# Altium PCB PCB.PcbDoc
Units mil, origin at the board's own origin, x right, y up, seen from the top; angles counter-clockwise.
Board outline 6000 x 4000 mil, 2 copper layers (Top Layer, Bottom Layer); 41 components, 27 nets, 106 pads, 32 vias.
Unrouted connection lines stored in the file: 69.
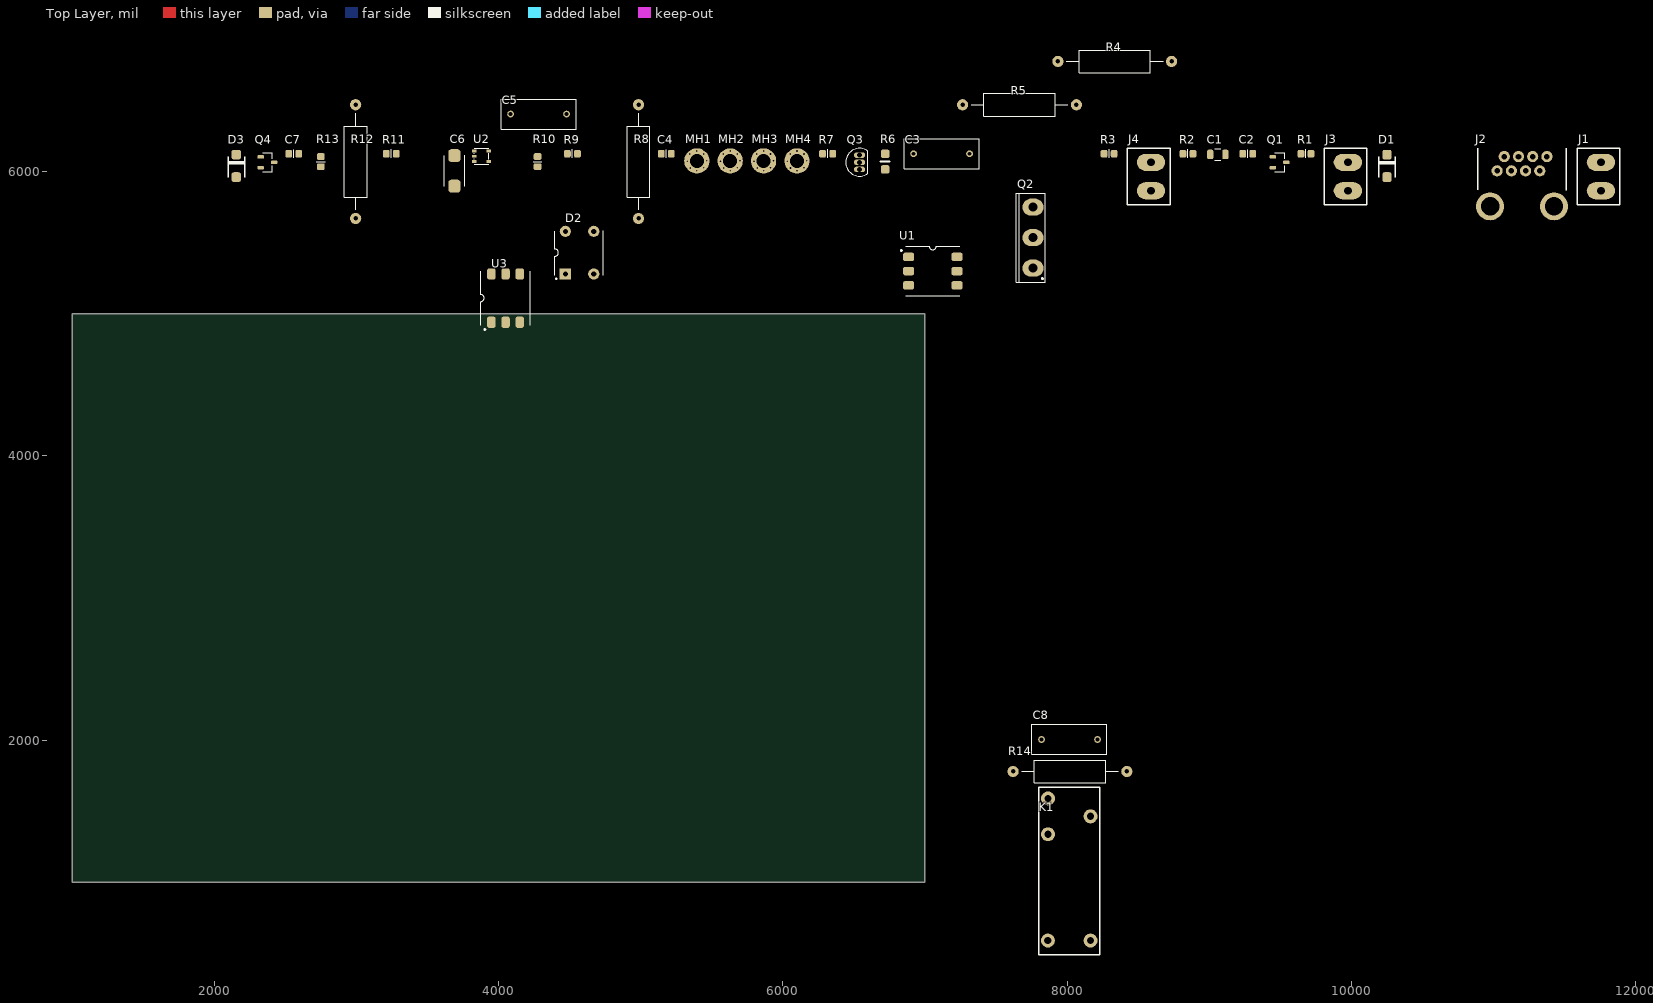
[diagram p0: Top Layer view]
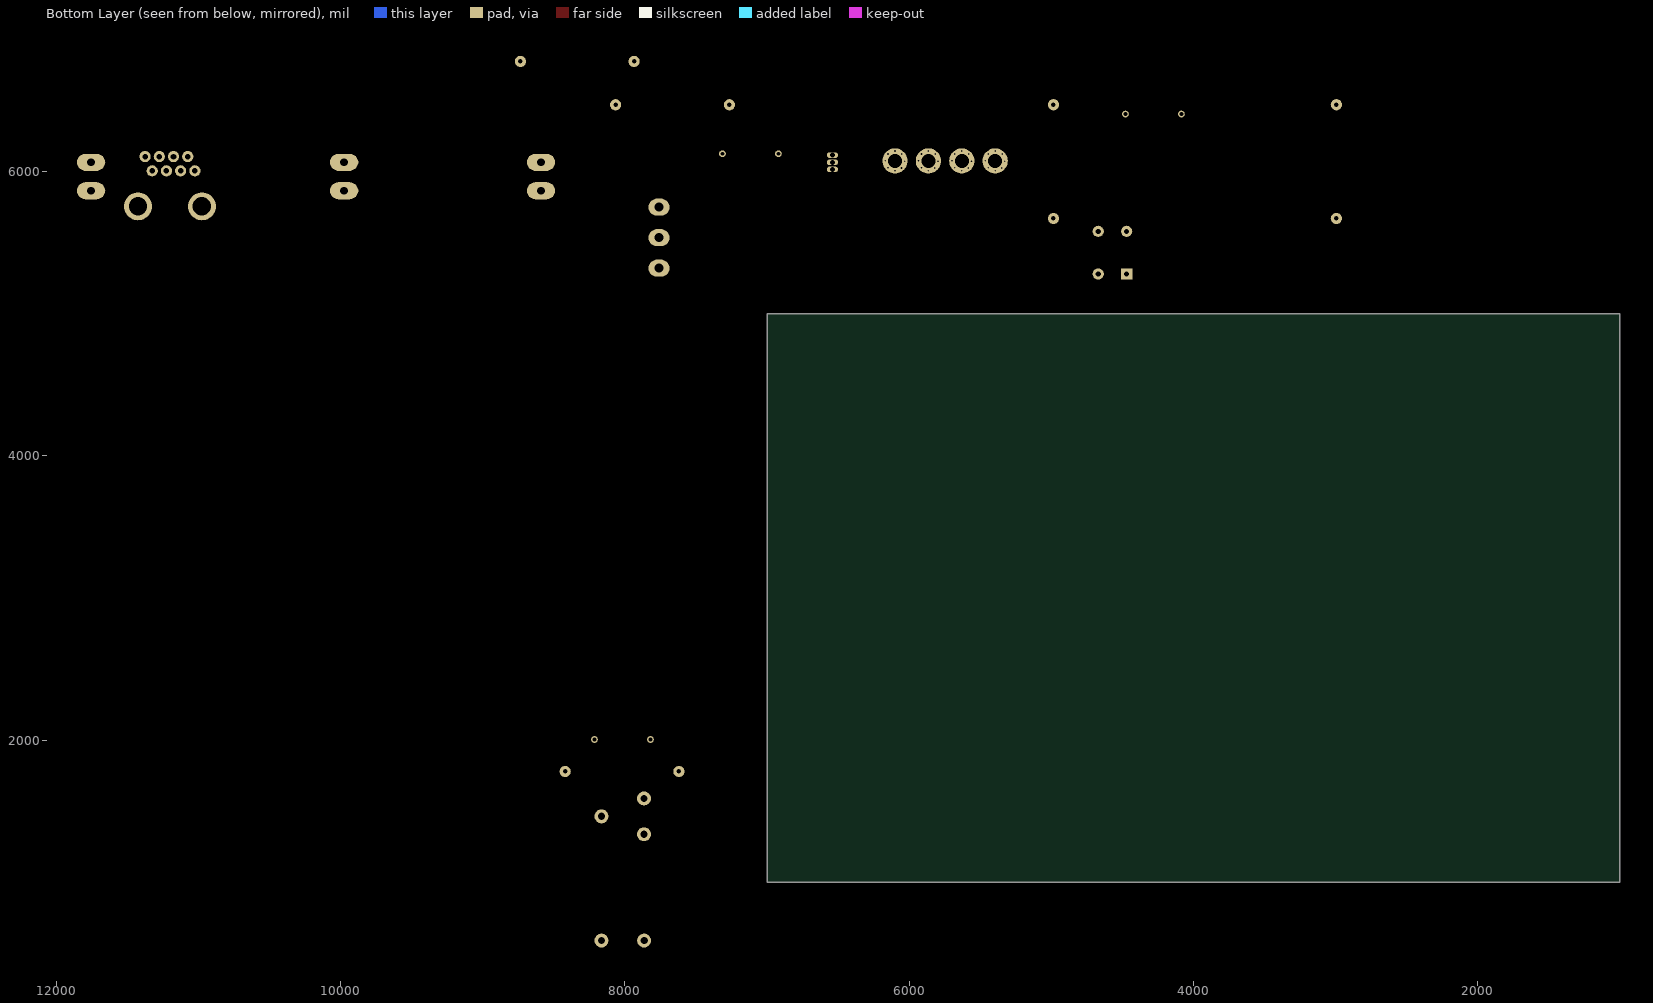
[diagram p1: Bottom Layer view, seen from below]

## Layer stack, top to bottom
Top Solder: solder mask 0.4, Solder Resist, Dk 3.5
Top Layer: signal copper 1.4
Dielectric 1: dielectric 12.6, FR-4, Dk 4.8
Bottom Layer: signal copper 1.4
Bottom Solder: solder mask 0.4, Solder Resist, Dk 3.5

## Board outline
1000,1000 7000,1000 7000,5000 1000,5000

## Design rules (kind name [scope] priority, off if disabled: settings)
Clearance [All] p1: gap=10 ignorepadtopadclearanceinfootprint=FALSE except(0: Arc-Hole Track-Hole SMDPad-Hole THPad-Hole Via-Hole Fill-Hole Poly-Hole Region-Hole Text-Hole)
PolygonConnect [All] p1: connectstyle=Relief reliefconductorwidth=10 reliefentries=4 polygonreliefangle="90 Angle" airgapwidth=10
RoomDefinition boxer_hv230 [InComponentClass('boxer_hv230')] p1: confinementstyle=ConfineIn formatcopy=TRUE lockcomponents=FALSE outline 154.57,0 12410,0 12410,7840 154.57,7840
RoutingVias [All] p1: holewidth=28 width=50 viastyle="Through Hole" minholewidth=28 minwidth=50 maxholewidth=28 maxwidth=50
SolderMaskExpansion [All] p1: expansion=4
Width [All] p1: maxlimit=10 minlimit=10 preferedwidth=10
30 further rules are at their usual default settings.

## Components (designator, comment, footprint, x,y, rotation, side; value= is the part's Value field where it differs from the comment)
C1 "Capacitor" C_1206 9060,6120.43 r0 top value=10u
C2 "Capacitor" C_0805 9270,6125.43 r0 top value=100n
C3 "Capacitor" RAD-0.4 6920,6125.43 r0 top value=10n/400V
C4 "Capacitor" C_0805 5180,6125.43 r0 top value=100n
C5 "Capacitor" RAD-0.4 4085,6405 r0 top value=1n/400V
C6 "Capacitor Polar" C_SMC 3690,6005.43 r90 top value=4u7
C7 "Capacitor" C_0805 2560,6125.43 r0 top value=100n
C8 "Capacitor" RAD-0.4 8213.7,2005 r180 top value=10n/400V
D1 "SS110-TP" D_SMA 10250,6040.43 r90 top
D2 "DB104" DB10x 4570,5430 r90 top
D3 "1N4007" D_SMA 2155,6040.43 r90 top
J1 "TB-5.08-P-2P/BL" "NINIGI TB-5.08 2pin" 11755,5965.43 r90 top
J2 "54601-908WPLF" RJ45_54601-908WPLF 11025,6005.43 r0 top
J3 "TB-5.08-P-2P/BL" "NINIGI TB-5.08 2pin" 9975,5965.43 r90 top
J4 "TB-5.08-P-2P/BL" "NINIGI TB-5.08 2pin" 8590,5965.43 r90 top
K1 "Relay" RM96_1P 8014.57,1086.5 r90 top value=RM96-3011-35-1005
MH1 "Mounting hole" MH_M2.5 5395,6075.43 r0 top
MH2 "Mounting hole" MH_M2.5 5630,6075.43 r0 top
MH3 "Mounting hole" MH_M2.5 5865,6075.43 r0 top
MH4 "Mounting hole" MH_M2.5 6100,6075.43 r0 top
Q1 "BC817-40-DIO" SOT-23 9495,6065.43 r0 top
Q2 "BTA41-600BRG" TO-247 7760,5535 r90 top
Q3 "BC817-40-DIO" TO-92 6540,6065.43 r0 top
Q4 "BC817-40-DIO" SOT-23 2375,6065.43 r0 top
R1 "Resistor" R_0805 9680,6125.43 r0 top value=4k7
R2 "Resistor" R_0805 8850,6125.43 r0 top value=47k
R3 "Resistor" R_0805 8295,6125.43 r0 top value=365
R4 "Resistor" AXIAL-0.8 8335,6775 r0 top value=47/1W
R5 "electropark.pl: 6618" AXIAL-0.8 7665,6470 r0 top value=330/1W
R6 "Resistor" R_1206 6720,6070.43 r90 top value=10k
R7 "Resistor" R_0805 6315,6125.43 r0 top value=100k
R8 "Resistor" AXIAL-0.8 4985,6070.43 r90 top value=220k
R9 "Resistor" R_0805 4520,6125.43 r0 top value=4k7
R10 "Resistor" R_0805 4275,6070.43 r90 top value=1k
R11 "Resistor" R_0805 3245,6125.43 r0 top value=33
R12 "Resistor" AXIAL-0.8 2995,6070.43 r90 top value=220k
R13 "Resistor" R_0805 2750,6070.43 r90 top value=22k
R14 "Resistor" AXIAL-0.8 8020,1780 r0 top value=47/1W
U1 "Triac Opto" SOP6 7055,5300 r0 top value=MOC3052S
U2 "NC7NZ14K8X" SOP5(6) 3830,6145.43 r0 top
U3 "4N35XSM" SOP6 4049.57,5110.43 r90 top

## Footprints (in the part's own frame and the unit in brackets; to place one, negate y for a bottom-side part, rotate by r counter-clockwise, add the part's x,y. Pads: shape width x height; smd on the part's side, far side on the other; paste and mask are expansions set on the pad)
AXIAL-0.8 [mm] "Axial Device, Thru-Hole; 2 Leads; 0.8 in Pin Spacing"
  round 2 hole 0.8: 1(-10.16,0) 2(10.16,0)
  silkscreen extent -8.64,-2.03 8.64,2.03
C_0805 [mm] "Chip Capacitor, Body 2.0x1.3mm, IPC High Density"
  rrect50% 1.2x1.4 smd: 1(-0.9,0) 2(0.9,0)
  silkscreen extent 0,-0.75 0,0.72, body extent -1.01,-0.62 0.99,0.63, height 0.8
C_1206 [mm] "Chip Capacitor, Body 3.2x1.6mm, IPC High Density"
  rrect50% 1.1x1.7 smd: 1(-1.35,0) 2(1.35,0)
  silkscreen extent -0.51,-1.02 0.51,1.02, body extent -1.6,-0.8 1.6,0.8, height 1
C_SMC [mil] "TAJ Series Standard Tantalum"
  rrect50% 90x86 smd: 1(-107.5,0) 2(107.5,0)
  silkscreen extent -109,-72 108,72, body extent -121,-66 120,66, height 106
D_SMA [mm]
  rrect50% 1.73x1.67 smd: 1(-2.007,0) 2(2.007,0)
  silkscreen extent -2.01,-1.5 1.63,1.45, body extent -2.55,-1.38 2.45,1.32, height 2.28
DB10x [mm]
  rect 2x2 hole 0.9: 1(-3.81,2.54)
  round 2 hole 0.9: 2(3.81,-2.54) 3(-3.81,-2.54) 4(3.81,2.54)
  silkscreen extent -4.8,-4.22 3.91,4.39, body extent -4.01,-4 3.91,4.2, height 3.35
MH_M2.5 [mm] "M2.5"
  round 4.5 hole 2.5: MH(0,0)
"NINIGI TB-5.08 2pin" [mil] "NINIGI TB-5.08-P-2P/BL"
  oval 120x200 hole 55.12: 1(-100,0) 2(100,0)
  silkscreen extent -200,-134 200,165, body extent -200,-130 200,165, height 394
R_0805 [mm] "Chip Resistor, Body 2.0x1.2mm, IPC Medium Density"
  rrect50% 1.2x1.4 smd: 1(-0.9,0) 2(0.9,0)
  silkscreen extent 0,-0.75 0,0.77, body extent -1.16,-0.67 1.14,0.68, height 0.76
R_1206 [mil]
  rrect50% 60x60 smd: 1(-55,0) 2(55,0)
  silkscreen extent 0,-31 0,33, body extent -62,-31 64,32, height 22
RAD-0.4 [mm] "Radial Cap, Thru-Hole; 2 Leads; 0.4 in Pin Spacing"
  round 1.2 hole 0.7: 1(0,0) 2(10,0)
  silkscreen extent -1.68,-2.72 11.71,2.67, body extent -1.59,-2.6 11.61,2.6, height 12.25
RJ45_54601-908WPLF [mm]
  round 2 hole 1: 1(0,0) 2(1.27,2.54) 3(2.54,0) 4(3.81,2.54) 5(5.08,0) 6(6.35,2.54) 7(7.62,0) 8(8.89,2.54)
  round 5 hole 3.3 unplated: MH2(-1.27,-6.35) MH3(10.16,-6.35)
  silkscreen extent -3.45,-3.45 12.37,4, body extent -3.17,-14.28 12.07,3.73, height 12
RM96_1P [mm] "RM96 miniature relay"
  round 2.5 hole 1.3: 1(-12.6,-3.81) 2(-12.6,3.81) 3(6.4,3.79) 4(9.6,-3.81) 5(12.8,3.79)
  silkscreen extent -15.09,-5.46 14.83,5.46, body extent -15.67,-5.03 14.33,4.97, height 15.8
SOP5(6) [mm] "Small Outline; 6 Leads (1 Absent); Body Width 4.4 mm; Pitch 1.27 mm"
  rect 0.8x0.5 smd mask+0.076: 1(0,0) 2(0,-0.95) 3(0,-1.9) 4(2.6,-1.9) 5(2.6,0)
  silkscreen extent 0,-2.39 2.62,0.51, body extent 0.1,-2.47 2.6,0.53, height 1.11
SOP6 [mm] "Small Outline; 6 Leads; Body Width 4.4 mm; Pitch 1.27 mm"
  rrect50% 2x1.5 smd: 1(-4.318,2.54) 2(-4.318,0) 3(-4.318,-2.54) 4(4.318,-2.54) 5(4.318,0) 6(4.318,2.54)
  silkscreen extent -5.74,-4.44 4.83,4.44, body extent -4.58,-4.19 4.58,4.32, height 4
SOT-23 [mm] "SOT23, 3-Leads, Body 2.9x1.3mm, Pitch 0.95mm, Lead Span 2.5mm, IPC Medium Density"
  rrect50% 1.15x0.6 smd: 1(-1.219,0.965) 2(-1.219,-0.965) 3(1.194,0)
  silkscreen extent -0.89,-1.68 0.89,1.68, body extent -1.53,-1.5 1.47,1.5, height 1.3
TO-92 [mm] "TO, Flat Index; 3 In-Line, Axial Leads; Body Dia. 4.5mm; Leads 0.51 x 0.48 mm (max)"
  oval 2x1 hole 0.9: 1(0,1.27) 2(0,0) 3(0,-1.27)
  silkscreen extent -2.48,-2.48 1.5,2.48, body extent -2.38,-2.38 1.25,2.38, height 4.82
TO-247 [mm] "SIP with Mounting Hole; 3 Leads; Body 20 x 15.6 x 5 mm (typ); Pitch 5.45 mm"
  oval 3.048x3.81 hole 1.6: 1(-5.45,0) 2(0,0) 3(5.45,0)
  silkscreen extent -7.95,-2.18 7.95,2.98, body extent -7.78,-1.52 7.72,2.98, height 27.9

## Part data
C6: "Polarized Capacitor"
D1: library part "Diode Schottky", "Schottky Diode"
D2: library part "Graetz Bridge", "Full Wave Diode Bridge"
D3: library part Diode, "Diode"
J1 J3 J4: library part "Header 2", "Terminal Block"
J2: library part RJ45-8, "RJ45 Socket, 8pin, No Key, Molex MX-95001-2881"
K1: "Electromagnetic Relay"
MH1 MH2 MH3 MH4: "Mounting hole 2.3mm"
Q1 Q3 Q4: library part NPN, "NPN Bipolar Transistor"
Q2: library part Triac, "Triac"
R5: library part Resistor, "Resistor"
U1: "Opto-Triac"
U2: library part "NOT Schmitt", "TinyLogic ULP Inverter with Schmitt Trigger Input"
U3: library part Optocoupler, "Optocoupler"

## Via types
v1: diameter 23.62, hole 11.81, Top Layer to Bottom Layer, tented both sides, 32 vias

## Nets (pads, with @x,y where several pads share a name; then routed paths per layer and width w, separated by ;. In a path a pad name is that pad's centre, name@x,y a point inside that pad or via, vN(x,y) a via of type N, cw(c..) or ccw(c..) an arc to the next point about the centre after c; other vN are vias at no path point)
230V_L: J1.1 K1.4 Q2.2 R4.2 R8.1 R14.2
230V_N: J1.2 J3.1 J4.1 R12.1
+5V: C1.2 C2.1 D1.2 J2.1 J2.2 J2.3 R3.2 R9.2 U2.5
AC_SIG0: J2.6 U2.4
DC+: C6.1 D2.1 R10.2 R13.2
DC-: D2.3 D3.2 Q4.1 R13.1
FAN_230V: J2.8 R6.1
GND: C1.1 C2.2 C4.2 C7.1 J2.5 J2.7 MH1.MH MH2.MH MH3.MH MH4.MH Q1.2 Q3.2 R2.1 R7.1 U2.3 U3.4
  other v1: 5395,6006.54 5630,6006.54 5865,6006.54 6100,6006.54 5349.07,6025.32 5584.07,6025.32 5819.07,6025.32 6054.07,6025.32 5443.72,6026.72 5678.72,6026.72 5913.72,6026.72 6148.72,6026.72 5327.09,6072.48 5562.09,6072.48 5797.09,6072.48 6032.09,6072.48 5463.9,6075.43 5698.9,6075.43 5933.9,6075.43 6168.9,6075.43 5346.28,6124.15 5443.72,6124.15 5581.28,6124.15 5678.72,6124.15 5816.28,6124.15 5913.72,6124.15 6051.28,6124.15 6148.72,6124.15 5395,6144.33 5630,6144.33 5865,6144.33 6100,6144.33
LAMP_L: C8.1 J3.2 K1.5
LED_LAMP: J2.4 R1.1
NetC3_1: C3.1 J4.2 Q2.1
NetC3_2: C3.2 R4.1 U1.4
NetC5_1: C5.1 D2.4 R12.2
NetC5_2: C5.2 D2.2 R8.2
NetC6_2: C6.2 D3.1 Q4.3
NetC7_2: C7.2 R11.2 U2.2
NetC8_2: C8.2 R14.1
NetD1_1: D1.1 K1.2 Q1.3
NetQ1_1: Q1.1 R1.2 R2.2
NetQ2_3: Q2.3 R5.2
NetQ3_1: Q3.1 R6.2 R7.2
NetQ3_3: Q3.3 U1.2
NetQ4_2: Q4.2 U3.2
NetR3_1: R3.1 U1.1
NetR5_1: R5.1 U1.6
NetR9_1: R9.1 R11.1 U3.3
NetR10_1: R10.1 U3.1
pads on no net: C4.1 J2.MH2 J2.MH3 K1.1 K1.3 U1.3 U1.5 U2.1 U3.5 U3.6